# Altium PCB ArmourK08小智音响（1.54寸屏-充电可开关机版irony)PCB.pcbdoc
Units mil, origin at the board's own origin, x right, y up, seen from the top; angles counter-clockwise.
Board outline 1771.7 x 1418.1 mil, 2 copper layers (Top Layer, Bottom Layer), stack 62.2 mil thick; 89 components, 62 nets, 323 pads, 145 vias.
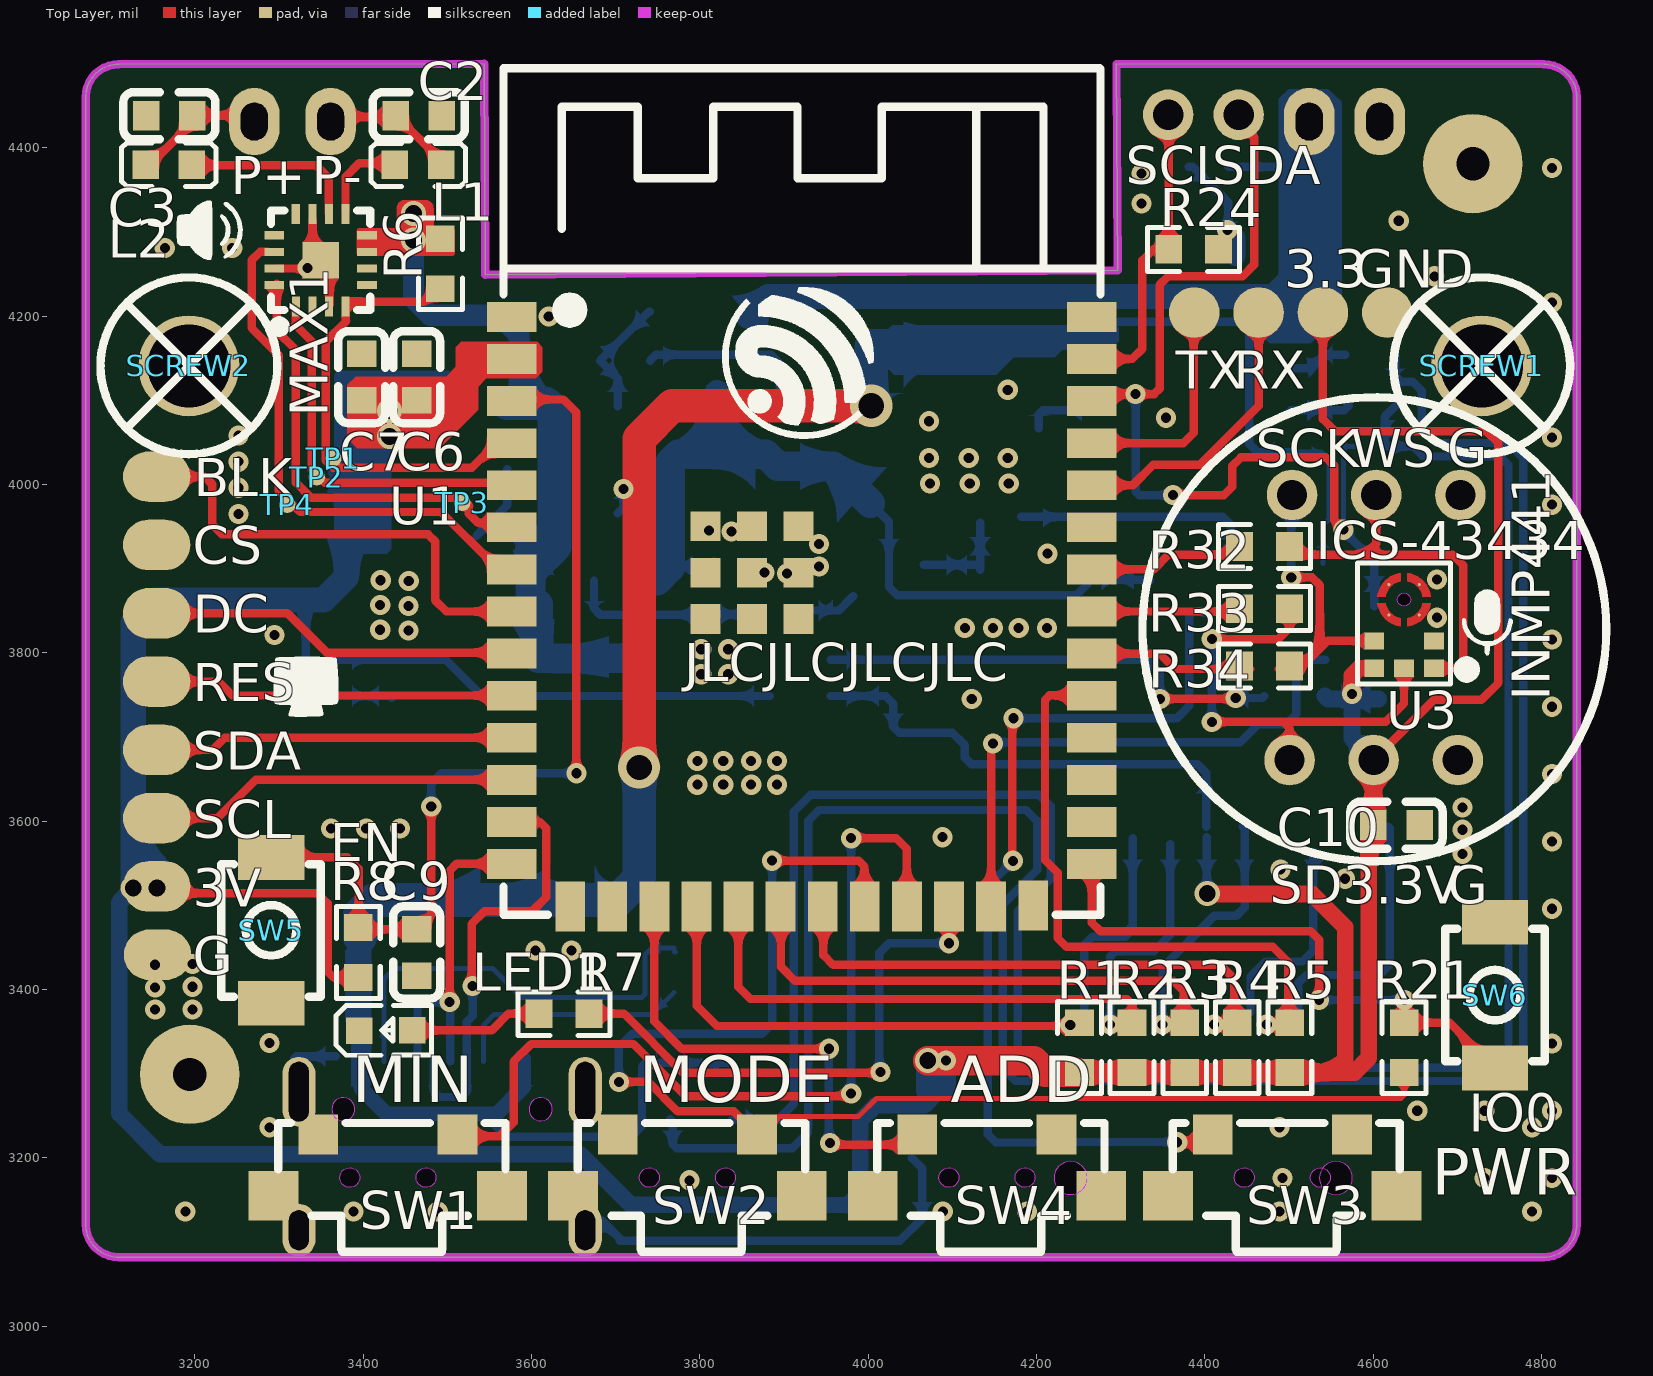
[diagram p0: Top Layer view]
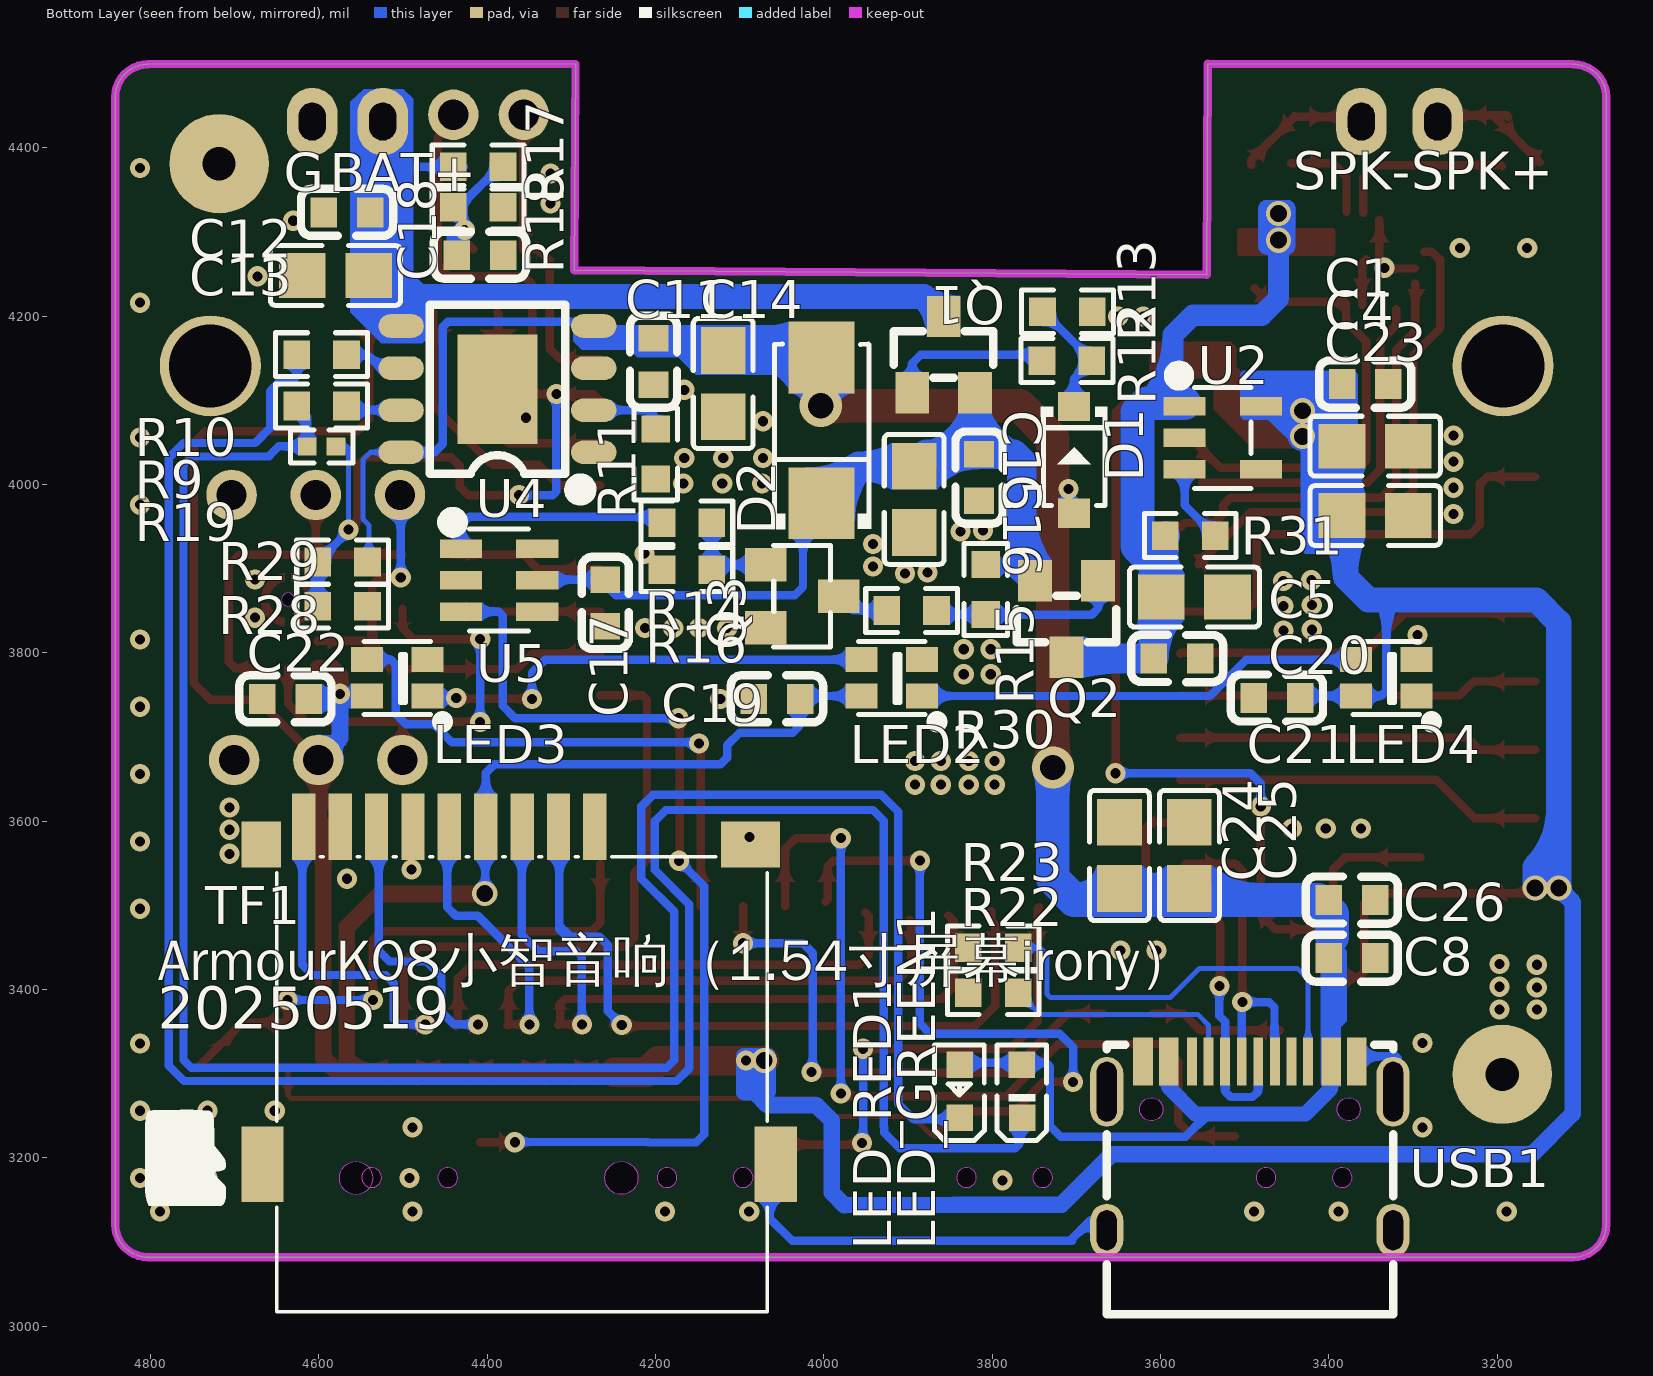
[diagram p1: Bottom Layer view, seen from below]

## Layer stack, top to bottom
Top Solder Mask Layer: solder mask 0.4, Dk 3.3
Top Layer: signal copper 1.4
SUBSTRATE1: surface 59.4, FR4, Dk 4.5
Bottom Layer: signal copper 1.4
Bottom Solder Mask Layer: solder mask 0.4, Dk 3.3

## Board outline
3070.3,3121.4 ccw(c3109.7,3121.4) 3109.7,3082 4802.6,3082 ccw(c4802.6,3121.4) 4841.9,3121.4 4841.9,4460 ccw(c4802.6,4460) 4802.6,4499.4 4295,4499.7 4296.3,4254.4 3544.9,4249.5 3544.1,4500.1 3109.7,4499.4 ccw(c3109.7,4460) 3070.3,4460

## Design rules (kind name [scope] priority, off if disabled: settings)
BoardOutlineClearance copperThickness1oz [All] p0: genericclearance=10 ignorepadtopadclearanceinfootprint=FALSE except(0: Arc-SplitContinuation Track-SplitContinuation SMDPad-SplitContinuation THPad-SplitContinuation Via-SplitContinuation Fill-SplitContinuation Poly-SplitContinuation Region-SplitContinuation Text-SplitContinuation)
BoardOutlineClearance copperThickness2oz [All] p0: genericclearance=10 ignorepadtopadclearanceinfootprint=FALSE except(0: Arc-SplitContinuation Track-SplitContinuation SMDPad-SplitContinuation THPad-SplitContinuation Via-SplitContinuation Fill-SplitContinuation Poly-SplitContinuation Region-SplitContinuation Text-SplitContinuation)
BoardOutlineClearance Plane_innerPlane [All] p0: genericclearance=10 ignorepadtopadclearanceinfootprint=FALSE except(0: Arc-SplitContinuation Track-SplitContinuation SMDPad-SplitContinuation THPad-SplitContinuation Via-SplitContinuation Fill-SplitContinuation Poly-SplitContinuation Region-SplitContinuation Text-SplitContinuation)
BoardOutlineClearance Copper_copperRegion [All] p0: genericclearance=10 ignorepadtopadclearanceinfootprint=FALSE except(0: Arc-SplitContinuation Track-SplitContinuation SMDPad-SplitContinuation THPad-SplitContinuation Via-SplitContinuation Fill-SplitContinuation Poly-SplitContinuation Region-SplitContinuation Text-SplitContinuation)
BoardOutlineClearance otherClearance [All] p0: genericclearance=10 ignorepadtopadclearanceinfootprint=FALSE except(0: Arc-SplitContinuation Track-SplitContinuation SMDPad-SplitContinuation THPad-SplitContinuation Via-SplitContinuation Fill-SplitContinuation Poly-SplitContinuation Region-SplitContinuation Text-SplitContinuation)
Clearance copperThickness1oz [All] p1: gap=7 ignorepadtopadclearanceinfootprint=FALSE
Clearance copperThickness2oz [All] p1: gap=7 ignorepadtopadclearanceinfootprint=FALSE
Clearance Plane_innerPlane [All] p1: gap=7 ignorepadtopadclearanceinfootprint=FALSE
Clearance Copper_copperRegion [All] p1: gap=7 ignorepadtopadclearanceinfootprint=FALSE
Clearance otherClearance [All] p1: gap=7 ignorepadtopadclearanceinfootprint=FALSE
DiffPairsRouting differentialPair [All] p1: maxuncoupledlength=10 minlimit=5.9843 maxlimit=Infinity mostfreqgap=5.9843 toplayer_minwidth=5 toplayer_prefwidth=10 toplayer_maxwidth=100 bottomlayer_minwidth=5 bottomlayer_prefwidth=10 bottomlayer_maxwidth=100
PasteMaskExpansion pasteMaskExpansion [All] p1: expansion=0
PlaneConnect innerPlane [All] p1: planeconnectstyle=Relief reliefexpansion=20 reliefentries=4 reliefconductorwidth=10 reliefairgap=10
PolygonConnect copperRegion [All] p1: connectstyle=Relief reliefentries=4 reliefconductorwidth=10 polygonreliefangle="90 Angle" airgapwidth=10
RoutingVias viaSize [All] p1: viastyle="Through Hole" holewidth=12.0078 minholewidth=11.811 maxholewidth=248.0314 width=12.0078 minwidth=11.811 maxwidth=248.0314
SolderMaskExpansion solderMaskExpansion [IsVia] p1: useseparateexpansions=TRUE expansion=-1000 expansionbottom=-1000
SolderMaskExpansion solderMaskExpansion [All] p2: useseparateexpansions=TRUE expansion=2.0079 expansionbottom=2.0079
Width copperThickness1oz [All] p1: maxlimit=100 minlimit=5 preferedwidth=10
Width copperThickness2oz [All] p1: maxlimit=100 minlimit=8 preferedwidth=10

## Components (designator, comment, footprint, x,y, rotation, side; value= is the part's Value field where it differs from the comment)
C1 "100nF" C0603#1 3356.7,4119.5 r0 bottom
C2 "220pF" C0603#2 3466,4438.3 r180 top
C3 "220pF" C0603#2 3169.7,4438.3 r0 top
C4 "22uF" C0805#1 3344.9,4045.7 r0 bottom
C5 "22uF" C0805#2 3559.7,3866.4 r0 bottom
C6 "100nF" C0603#1 3463.6,4127.6 r90 top
C7 "10uF" C0603#1 3398.3,4127.6 r90 top
C8 "10uF" C0603#2 3372.7,3437.4 r0 bottom
C9 "1uF" C0603#2 3463.6,3444.1 r90 top
C10 "100nF" C0603#1 4627.7,3595.4 r180 top
C11 "100nF" C0603#2 4202.4,4146 r270 bottom
C12 "100nF" C0603#2 4566.4,4323.4 r0 bottom
C13 "10uF" C0805#1 4580.2,4248.4 r0 bottom
C14 "10uF" C0805#1 4119.5,4120 r270 bottom
C15 "10uF" C0805#1 3892.7,3982.4 r90 bottom
C16 "100nF" C0603#3 3815.7,4008.4 r90 bottom
C17 "100nF" C0603#3 4259.7,3859.4 r270 bottom
C18 "100nF" C0603#2 4408.5,4272.4 r0 bottom
C19 "100nF" C0603#2 4055.7,3745.4 r0 bottom
C20 "100nF" C0603#1 3580.2,3793.4 r0 bottom
C21 "100nF" C0603#1 3461.7,3746.4 r180 bottom
C22 "100nF" C0603#1 4639.7,3745.4 r180 bottom
C23 "22uF" C0805#1 3344.9,3963.2 r180 bottom
C24 "22uF" C0805#1 3648.7,3559.4 r270 bottom
C25 "22uF" C0805#1 3565.7,3559.4 r270 bottom
C26 "100nF" C0603#2 3372.7,3506.4 r0 bottom
D1 "1N4148W" SOD-123_L2.7-W1.6-LS3.7-FD 3702.7,4029.4 r90 bottom
D2 "SS34" SMA_L4.3-W2.6-LS5.2-RD 4002.7,4064.4 r90 bottom
L1 "1uH" L0603 3465.4,4379.9 r180 top
L2 "1uH" L0603 3169,4380 r0 top
LED1 "NCD0603G1" LED0603-RD-YELLOW 3426.7,3351.4 r0 top
LED2 "WS2812C-2020-V1" LED-SMD_4P-L2.0-W2.0-TL_WS2812B-2020 3919.3,3770.4 r0 bottom
LED3 "WS2812C-2020-V1" LED-SMD_4P-L2.0-W2.0-TL_WS2812B-2020 4506.8,3770.4 r0 bottom
LED4 "WS2812C-2020-V1" LED-SMD_4P-L2.0-W2.0-TL_WS2812B-2020 3331.8,3770.4 r0 bottom
LED_GREEN1 "XL-1608PGC-06" LED0603-RD_GREEN 3764.7,3279.4 r90 bottom
LED_RED1 "KT-0603R" LED0603-RD 3838.7,3279.4 r90 bottom
MAX1 "MAX98357AETE+T" TQFN-16_L3.0-W3.0-P0.50-BL-EP1.1 3349.5,4266.5 r0 top
Q1 "AO3401A" SOT-23_L2.9-W1.3-P1.90-LS2.4-BR 3857.7,4154.4 r270 bottom
Q2 "AO3401A" SOT-23_L2.9-W1.3-P1.90-LS2.4-BR 3711.7,3840.4 r90 bottom
Q3 "S8050 J3Y(RANGE:200-350)" SOT-23-3_L3.0-W1.7-P0.95-LS2.9-BR 4025.7,3867.4 r0 bottom
R1 "10kΩ" R0603#1 4251,3331 r90 top
R2 "10kΩ" R0603#1 4313.5,3331 r90 top
R3 "10kΩ" R0603#1 4376,3331 r90 top
R4 "10kΩ" R0603#1 4438.5,3331 r90 top
R5 "10kΩ" R0603#1 4501,3331 r90 top
R6 "1MΩ" R0603#2 3491.8,4262.3 r270 top
R7 "1kΩ" R0603#1 3638.7,3371.4 r180 top
R8 "10kΩ" R0603#2 3394.3,3444.1 r270 top
R9 "4.7kΩ" R0603#1 4596.7,4093.4 r180 bottom
R10 "10kΩ" R0603#1 4596.7,4154.4 r180 bottom
R11 "4.7kΩ" R0603#2 4199.7,4036.4 r270 bottom
R12 "100kΩ" R0603#3 3711.2,4147.3 r180 bottom
R13 "100kΩ" R0603#1 3710.7,4205.4 r180 bottom
R14 "10kΩ" R0603#3 4162.7,3954.6 r180 bottom
R15 "100kΩ" R0603#2 3807.7,3875.4 r90 bottom
R16 "100kΩ" R0603#1 4162.7,3899 r0 bottom
R17 "10kΩ" R0603#3 4410.7,4377.4 r0 bottom
R18 "10kΩ" R0603#3 4410.7,4329.4 r0 bottom
R19 "4.7kΩ" R0402 4596.7,4045.4 r0 bottom
R21 "0Ω" R0603#3 4636.7,3331 r270 top
R22 "5.1kΩ" R0603#1 3798.8,3396.4 r180 bottom
R23 "5.1kΩ" R0603#1 3798.8,3449.6 r180 bottom
R24 "0Ω" R0603#3 4386.7,4279.4 r0 top
R28 "10kΩ" R0603#3 4571.7,3855.4 r0 bottom
R29 "10kΩ" R0603#1 4571.7,3908 r180 bottom
R30 "0Ω" R0603#1 3895.7,3850.4 r180 bottom
R31 "100kΩ" R0603#3 3564.7,3939.4 r0 bottom
R32 "0Ω" R0603#3 4471,3926.4 r0 top
R33 "0Ω" R0603#1 4471,3852.7 r180 top
R34 "0Ω" R0603#1 4471,3784.4 r180 top
SCREW1 "" M3螺丝 4728.9,4141 r0 top
SCREW2 "" M3螺丝 3193,4141 r0 top
SW1 "TS-1087B-B2D2" KEY-SMD_4P-L7.8-W2.8-P4.20-EH 3429.3,3191.4 r180 top
SW2 "TS-1087B-B2D2" KEY-SMD_4P-L7.8-W2.8-P4.20-EH 3785.2,3191.4 r180 top
SW3 "TS-1087B-B2D2" KEY-SMD_4P-L7.8-W2.8-P4.20-EH 4492,3191.4 r180 top
SW4 "TS-1087B-B2D2" KEY-SMD_4P-L7.8-W2.8-P4.20-EH 4141.1,3191.4 r180 top
SW5 "TC-S3403-2.0-260G" SW-SMD_L4.0-W3.0-LS5.0 3290.7,3470.4 r90 top
SW6 "TC-S3403-2.0-260G" SW-SMD_L4.0-W3.0-LS5.0 4744.7,3393.4 r90 top
TF1 "TF-015" TF-SMD_TF-015 4362.8,3393 r180 bottom
TP1 "" Test-Point-0.5mm 3364.7,4031.2 r0 top
TP2 "" Test-Point-0.5mm 3344.7,4008.8 r0 top
TP3 "" Test-Point-0.5mm 3517.7,3978.5 r0 top
TP4 "" Test-Point-0.5mm 3309.7,3976.1 r0 top
U1 "ESP32-S3-WROOM-1-N16R8" WIRELM-SMD_ESP32-S3-WROOM-1 3921,3849 r0 top locked
U2 "ME6211C33M5G-N" SOT-23-5_L3.0-W1.7-P0.95-LS2.8-BL 3526,4055.5 r270 bottom
U3 "ICS-43434" MIC-SMD_6P-L3.5-W2.7-P0.90-BL 4636.7,3832.4 r90 top
U4 "TP4056" ESOP-8_L4.9-W3.9-P1.27-LS6.0-BL-EP 4387.7,4113.4 r90 bottom
U5 "EC190708" SOT-23-6_L2.9-W1.6-P0.95-LS2.8-BL 4385.8,3886.4 r270 bottom
USB1 "Type-C" USB-C-SMD_TYPEC-304-BCP16 3493.7,3214.4 r180 bottom

## Footprints (in the part's own frame and the unit in brackets; to place one, negate y for a bottom-side part, rotate by r counter-clockwise, add the part's x,y. Pads: shape width x height; smd on the part's side, far side on the other; paste and mask are expansions set on the pad)
C0603#1 [mil]
  rect 31.5x35.4 smd: 1(-27.5,0) 2(27.6,0)
  silkscreen extent -55,-28 55,28
C0603#2 [mil]
  rect 31.5x35.4 smd: 1(-27.6,0) 2(27.5,0)
  silkscreen extent -55,-28 55,28
C0603#3 [mil]
  rect 31.5x35.4 smd: 1(-27.6,0) 2(27.6,0)
  silkscreen extent -55,-28 55,28
C0805#1 [mil]
  rect 55.5x53.1 smd paste-3937 mask+2: 1(-39.4,0) 2(39.4,0)
  silkscreen extent -77,-36 77,36
C0805#2 [mil]
  rect 55.5x53.1 smd paste-3937 mask+2: 1(-39.4,0) 2(39.3,0)
  silkscreen extent -77,-36 77,36
ESOP-8_L4.9-W3.9-P1.27-LS6.0-BL-EP [mil]
  oval 28x54 smd: 1(-75,-114.5) 2(-25,-114.5) 3(25,-114.5) 4(75,-114.5) 5(75,114.5) 6(25,114.5) 7(-25,114.5) 8(-75,114.5)
  rect 129.9x94.5 smd: 9(0,0)
  silkscreen extent -126,-105 100,81
KEY-SMD_4P-L7.8-W2.8-P4.20-EH [mil]
  rect 47.2x47.2 smd: 1(-82.7,-36.4) 2(82.7,-36.4)
  rect 59.1x59.1 smd: 3(-135.8,36.4) 4(135.8,36.4)
  Board Outline Layer lines w0.1: 57.1,14.7 56.7,11.8 55.6,9 53.9,6.6 51.6,4.8 48.9,3.5 46,2.9 43,3.1 40.2,4 37.7,5.6 35.7,7.8 34.3,10.4 33.5,13.2 33.5,16.2 34.3,19.1 35.7,21.7 37.7,23.8 40.2,25.4 43,26.3 46,26.5 48.9,26 51.6,24.7 53.9,22.8 55.6,20.4 56.7,17.7 57.1,14.7 ; -33.5,14.7 -33.9,11.8 -35,9 -36.7,6.6 -39,4.8 -41.7,3.5 -44.6,2.9 -47.5,3.1 -50.3,4 -52.8,5.6 -54.9,7.8 -56.3,10.4 -57,13.2 -57,16.2 -56.3,19.1 -54.9,21.7 -52.8,23.8 -50.3,25.4 -47.5,26.3 -44.6,26.5 -41.7,26 -39,24.7 -36.7,22.8 -35,20.4 -33.9,17.7 -33.5,14.7
  Board Outline Layer region: -33.5,14.7 -33.9,11.8 -35,9 -36.7,6.6 -39,4.8 -41.7,3.5 -44.6,2.9 -47.5,3.1 -50.3,4 -52.8,5.6 -54.9,7.8 -56.3,10.4 -57,13.2 -57,16.2 -56.3,19.1 -54.9,21.7 -52.8,23.8 -50.3,25.4 -47.5,26.3 -44.6,26.5 -41.7,26 -39,24.7 -36.7,22.8 -35,20.4 -33.9,17.7
  Board Outline Layer region: -33.5,14.7 -33.9,11.8 -35,9 -36.7,6.6 -39,4.8 -41.7,3.5 -44.6,2.9 -47.5,3.1 -50.3,4 -52.8,5.6 -54.9,7.8 -56.3,10.4 -57,13.2 -57,16.2 -56.3,19.1 -54.9,21.7 -52.8,23.8 -50.3,25.4 -47.5,26.3 -44.6,26.5 -41.7,26 -39,24.7 -36.7,22.8 -35,20.4 -33.9,17.7
  Board Outline Layer region: 57.1,14.7 56.7,11.8 55.6,9 53.9,6.6 51.6,4.8 48.9,3.5 46,2.9 43,3.1 40.2,4 37.7,5.6 35.7,7.8 34.3,10.4 33.5,13.2 33.5,16.2 34.3,19.1 35.7,21.7 37.7,23.8 40.2,25.4 43,26.3 46,26.5 48.9,26 51.6,24.7 53.9,22.8 55.6,20.4 56.7,17.7
  Board Outline Layer region: 57.1,14.7 56.7,11.8 55.6,9 53.9,6.6 51.6,4.8 48.9,3.5 46,2.9 43,3.1 40.2,4 37.7,5.6 35.7,7.8 34.3,10.4 33.5,13.2 33.5,16.2 34.3,19.1 35.7,21.7 37.7,23.8 40.2,25.4 43,26.3 46,26.5 48.9,26 51.6,24.7 53.9,22.8 55.6,20.4 56.7,17.7
  Multi-Layer board cut-out: -33.5,14.7 -33.9,11.8 -35,9 -36.7,6.6 -39,4.8 -41.7,3.5 -44.6,2.9 -47.5,3.1 -50.3,4 -52.8,5.6 -54.9,7.8 -56.3,10.4 -57,13.2 -57,16.2 -56.3,19.1 -54.9,21.7 -52.8,23.8 -50.3,25.4 -47.5,26.3 -44.6,26.5 -41.7,26 -39,24.7 -36.7,22.8 -35,20.4 -33.9,17.7
  Multi-Layer board cut-out: 57.1,14.7 56.7,11.8 55.6,9 53.9,6.6 51.6,4.8 48.9,3.5 46,2.9 43,3.1 40.2,4 37.7,5.6 35.7,7.8 34.3,10.4 33.5,13.2 33.5,16.2 34.3,19.1 35.7,21.7 37.7,23.8 40.2,25.4 43,26.3 46,26.5 48.9,26 51.6,24.7 53.9,22.8 55.6,20.4 56.7,17.7
  silkscreen extent -140,-50 130,103
L0603 [mil]
  rect 31.5x34 smd paste-3937 mask+2: 1(-27.5,0) 2(27.6,0)
  silkscreen extent -56,-26 56,26
LED0603-RD [mil]
  rect 31.5x31.5 smd: 1(-31.5,0) 2(31.5,0)
  silkscreen extent -59,-29 55,30
LED0603-RD-YELLOW [mil]
  rect 31.5x31.5 smd: 1(-31.5,-0.1) 2(31.4,0.1)
  silkscreen extent -59,-29 55,30
LED0603-RD_GREEN [mil]
  rect 31.5x31.5 smd: 1(-31.5,-0.2) 2(31.5,0.1)
  silkscreen extent -59,-29 55,30
LED-SMD_4P-L2.0-W2.0-TL_WS2812B-2020 [mil]
  rect 38x30 smd: 1(-36.1,21.6) 2(-36.1,-21.7) 3(36,-21.7) 4(36,21.6)
  silkscreen extent -54,-43 39,53
M3螺丝 [mil]
  round 120 hole 98.4 paste+0 mask+4: 1(0,0)
  silkscreen extent -105,-105 105,105
MIC-SMD_6P-L3.5-W2.7-P0.90-BL [mil]
  rect 20.5x23.6 smd paste+0 mask+2: 1(-50.6,-35.4) 2(-18.3,-35.4) 4(-18.3,35.5) 5(-50.6,35.5) 6(-50.6,0)
  round 3.4 smd: 3(12.7,18.1) 3(12.7,-18.1) 3(48.8,-18.1) 3(48.8,18.1)
  Top Layer region: -1,3.9 -1,3.9 -0.8,5.5 -0.4,7.1 0,8.7 0.4,10.3 1,11.8 1.6,13.3 2.4,14.8 3.2,16.2 4,17.6 4.9,18.9 5.9,20.2 7,21.5 8.1,22.7 9.3,23.8 10.6,24.9 11.8,25.9 13.2,26.8 14.6,27.6 16,28.4 17.5,29.2 19,29.8 20.5,30.4 22.1,30.8 23.7,31.2 25.3,31.6 26.9,31.8 26.9,31.8 26.9,21.9 25.6,21.6 24.3,21.2 23,20.8 21.7,20.3 20.5,19.7 19.3,19 18.2,18.3 17.1,17.5 16.1,16.6 15.1,15.7 14.2,14.7 13.3,13.7 12.5,12.6 11.8,11.5 11.1,10.3 10.5,9.1 10,7.8 9.6,6.5 9.2,5.2 8.9,3.9 8.9,3.9
  Top Layer region: 26.9,-31.7 26.9,-31.7 25.3,-31.5 23.7,-31.2 22.1,-30.8 20.5,-30.3 19,-29.7 17.5,-29.1 16,-28.4 14.6,-27.6 13.2,-26.7 11.8,-25.8 10.6,-24.8 9.3,-23.7 8.1,-22.6 7,-21.4 5.9,-20.2 4.9,-18.9 4,-17.5 3.2,-16.1 2.4,-14.7 1.6,-13.2 1,-11.7 0.4,-10.2 0,-8.7 -0.4,-7.1 -0.8,-5.5 -1,-3.9 -1,-3.8 8.9,-3.8 9.2,-5.1 9.6,-6.4 10,-7.7 10.5,-9 11.1,-10.2 11.8,-11.4 12.5,-12.5 13.3,-13.6 14.2,-14.7 15.1,-15.6 16.1,-16.6 17.1,-17.4 18.2,-18.2 19.3,-19 20.5,-19.6 21.7,-20.2 23,-20.7 24.3,-21.2 25.6,-21.5 26.9,-21.8 26.9,-21.8
  Top Layer region: 62.5,-3.8 62.5,-3.9 62.3,-5.5 62,-7.1 61.6,-8.7 61.1,-10.2 60.5,-11.7 59.9,-13.3 59.2,-14.7 58.4,-16.2 57.5,-17.5 56.6,-18.9 55.6,-20.2 54.5,-21.4 53.4,-22.6 52.2,-23.7 51,-24.8 49.7,-25.8 48.3,-26.7 46.9,-27.6 45.5,-28.4 44,-29.1 42.5,-29.7 41,-30.3 39.4,-30.8 37.9,-31.2 36.3,-31.5 34.6,-31.7 34.6,-31.7 34.6,-21.8 35.9,-21.5 37.2,-21.2 38.5,-20.7 39.8,-20.2 41,-19.6 42.2,-19 43.3,-18.2 44.4,-17.4 45.4,-16.6 46.4,-15.6 47.4,-14.7 48.2,-13.6 49,-12.5 49.8,-11.4 50.4,-10.2 51,-9 51.5,-7.7 52,-6.4 52.3,-5.1 52.6,-3.8 52.6,-3.8
  Top Layer region: 34.6,31.8 34.7,31.8 36.3,31.6 37.9,31.2 39.5,30.8 41,30.4 42.5,29.8 44,29.1 45.5,28.4 46.9,27.6 48.3,26.8 49.7,25.8 51,24.8 52.2,23.8 53.4,22.7 54.5,21.5 55.6,20.2 56.6,18.9 57.5,17.6 58.4,16.2 59.2,14.8 59.9,13.3 60.5,11.8 61.1,10.3 61.6,8.7 62,7.1 62.3,5.5 62.5,3.9 62.5,3.9 52.6,3.9 52.3,5.2 52,6.5 51.5,7.8 51,9 50.4,10.3 49.8,11.4 49,12.6 48.2,13.7 47.4,14.7 46.4,15.7 45.4,16.6 44.4,17.5 43.3,18.3 42.2,19 41,19.7 39.8,20.3 38.5,20.8 37.2,21.2 35.9,21.6 34.6,21.9 34.6,21.9
  Board Outline Layer lines w0.1: 31,7.9 28.5,7.5 26.3,6.4 24.6,4.7 23.5,2.5 23.1,0 23.5,-2.4 24.6,-4.6 26.3,-6.3 28.5,-7.5 31,-7.8 33.4,-7.5 35.6,-6.3 37.3,-4.6 38.4,-2.4 38.8,0 38.4,2.5 37.3,4.7 35.6,6.4 33.4,7.5 31,7.9
  Board Outline Layer region: 38.8,0 38.4,-2.4 37.3,-4.6 35.6,-6.3 33.4,-7.5 31,-7.8 28.5,-7.5 26.3,-6.3 24.6,-4.6 23.5,-2.4 23.1,0 23.5,2.5 24.6,4.7 26.3,6.4 28.5,7.5 31,7.9 33.4,7.5 35.6,6.4 37.3,4.7 38.4,2.5
  Board Outline Layer region: 38.8,0 38.4,-2.4 37.3,-4.6 35.6,-6.3 33.4,-7.5 31,-7.8 28.5,-7.5 26.3,-6.3 24.6,-4.6 23.5,-2.4 23.1,0 23.5,2.5 24.6,4.7 26.3,6.4 28.5,7.5 31,7.9 33.4,7.5 35.6,6.4 37.3,4.7 38.4,2.5
  Multi-Layer board cut-out: 38.8,0 38.4,-2.4 37.3,-4.6 35.6,-6.3 33.4,-7.5 31,-7.8 28.5,-7.5 26.3,-6.3 24.6,-4.6 23.5,-2.4 23.1,0 23.5,2.5 24.6,4.7 26.3,6.4 28.5,7.5 31,7.9 33.4,7.5 35.6,6.4 37.3,4.7 38.4,2.5
  silkscreen extent -70,-80 74,55
R0402 [mil]
  rect 22.3x21.3 smd paste-3937 mask+2: 1(-17.1,0) 2(17,0)
  silkscreen extent -37,-20 37,20
R0603#1 [mil]
  rect 31.8x34 smd paste-3937 mask+2: 1(-29.6,0) 2(29.7,0)
  silkscreen extent -54,-26 55,26
R0603#2 [mil]
  rect 31.8x34 smd paste-3937 mask+2: 1(-29.7,0) 2(29.7,0)
  silkscreen extent -55,-26 55,26
R0603#3 [mil]
  rect 31.8x34 smd paste-3937 mask+2: 1(-29.7,0) 2(29.6,0)
  silkscreen extent -55,-26 54,26
SMA_L4.3-W2.6-LS5.2-RD [mil]
  rect 85x78.7 smd: 1(-86.6,0) 2(86.6,0)
  silkscreen extent -117,-59 102,59
SOD-123_L2.7-W1.6-LS3.7-FD [mil]
  rect 34.6x37.8 smd: 1(-63.4,0) 2(63.4,0)
  silkscreen extent -54,-40 63,39
SOT-23-3_L3.0-W1.7-P0.95-LS2.9-BR [mil]
  rect 49.2x40 smd: 1(43.3,-37.4) 2(43.3,37.4) 3(-43.4,0)
  silkscreen extent -34,-60 34,60
SOT-23-5_L3.0-W1.7-P0.95-LS2.8-BL [mil]
  rect 22x50 smd: 1(-37.4,-45.4) 2(0,-45.4) 3(37.4,-45.4) 4(37.4,45.4) 5(-37.4,45.4)
  silkscreen extent -82,-60 60,34
SOT-23-6_L2.9-W1.6-P0.95-LS2.8-BL [mil]
  rect 22x50 smd: 1(-37.4,-45.2) 2(0,-45.2) 3(37.4,-45.2) 4(37.4,45.3) 5(0,45.3) 6(-37.4,45.3)
  silkscreen extent -75,-61 61,35
SOT-23_L2.9-W1.3-P1.90-LS2.4-BR [mil]
  rect 49.2x40 smd: 1(45.3,-37.4) 2(45.3,37.4) 3(-45.3,0)
  silkscreen extent -28,-59 28,59
SW-SMD_L4.0-W3.0-LS5.0 [mil]
  rect 53.1x78.7 smd: 1(-86.6,0) 2(86.6,0)
  silkscreen extent -79,-59 79,59
Test-Point-0.5mm [mil]
  round 19.7 smd: 1(0,0)
TF-SMD_TF-015 [mil]
  rect 27.6x78.7 smd: 1(90.7,200.6) 2(47.6,200.6) 3(4.5,200.6) 4(-38.8,200.6) 5(-82.1,200.6) 6(-125.3,200.6) 7(-168.5,200.6) 8(-211.7,200.6) 9(-255.2,200.6)
  rect 47.2x55 smd: 10(-305.7,179.4)
  rect 50x90 smd: 11(-304.3,-200.6) 12(305.7,-200.6)
  rect 70x55 smd: 13(275.7,179.4)
  Board Outline Layer lines w0.1: 141.8,-216.7 141.5,-220.5 140.3,-224.2 138.5,-227.6 136.1,-230.6 133.1,-233 129.7,-234.9 126,-236 122.2,-236.4 118.3,-236 114.6,-234.9 111.2,-233 108.2,-230.6 105.8,-227.6 104,-224.2 102.9,-220.5 102.5,-216.7 102.9,-212.8 104,-209.1 105.8,-205.7 108.2,-202.7 111.2,-200.3 114.6,-198.5 118.3,-197.4 122.2,-197 126,-197.4 129.7,-198.5 133.1,-200.3 136.1,-202.7 138.5,-205.7 140.3,-209.1 141.5,-212.8 141.8,-216.7 ; -173.1,-216.8 -173.5,-220.6 -174.6,-224.3 -176.4,-227.7 -178.9,-230.7 -181.9,-233.1 -185.3,-235 -189,-236.1 -192.8,-236.5 -196.6,-236.1 -200.3,-235 -203.7,-233.1 -206.7,-230.7 -209.2,-227.7 -211,-224.3 -212.1,-220.6 -212.5,-216.8 -212.1,-212.9 -211,-209.2 -209.2,-205.8 -206.7,-202.8 -203.7,-200.4 -200.3,-198.6 -196.6,-197.5 -192.8,-197.1 -189,-197.5 -185.3,-198.6 -181.9,-200.4 -178.9,-202.8 -176.4,-205.8 -174.6,-209.2 -173.5,-212.9 -173.1,-216.8
  Board Outline Layer region: -173.1,-216.8 -173.5,-220.6 -174.6,-224.3 -176.4,-227.7 -178.9,-230.7 -181.9,-233.1 -185.3,-235 -189,-236.1 -192.8,-236.5 -196.6,-236.1 -200.3,-235 -203.7,-233.1 -206.7,-230.7 -209.2,-227.7 -211,-224.3 -212.1,-220.6 -212.5,-216.8 -212.1,-212.9 -211,-209.2 -209.2,-205.8 -206.7,-202.8 -203.7,-200.4 -200.3,-198.6 -196.6,-197.5 -192.8,-197.1 -189,-197.5 -185.3,-198.6 -181.9,-200.4 -178.9,-202.8 -176.4,-205.8 -174.6,-209.2 -173.5,-212.9
  Board Outline Layer region: -173.1,-216.8 -173.5,-220.6 -174.6,-224.3 -176.4,-227.7 -178.9,-230.7 -181.9,-233.1 -185.3,-235 -189,-236.1 -192.8,-236.5 -196.6,-236.1 -200.3,-235 -203.7,-233.1 -206.7,-230.7 -209.2,-227.7 -211,-224.3 -212.1,-220.6 -212.5,-216.8 -212.1,-212.9 -211,-209.2 -209.2,-205.8 -206.7,-202.8 -203.7,-200.4 -200.3,-198.6 -196.6,-197.5 -192.8,-197.1 -189,-197.5 -185.3,-198.6 -181.9,-200.4 -178.9,-202.8 -176.4,-205.8 -174.6,-209.2 -173.5,-212.9
  Board Outline Layer region: 141.8,-216.7 141.5,-220.5 140.3,-224.2 138.5,-227.6 136.1,-230.6 133.1,-233 129.7,-234.9 126,-236 122.2,-236.4 118.3,-236 114.6,-234.9 111.2,-233 108.2,-230.6 105.8,-227.6 104,-224.2 102.9,-220.5 102.5,-216.7 102.9,-212.8 104,-209.1 105.8,-205.7 108.2,-202.7 111.2,-200.3 114.6,-198.5 118.3,-197.4 122.2,-197 126,-197.4 129.7,-198.5 133.1,-200.3 136.1,-202.7 138.5,-205.7 140.3,-209.1 141.5,-212.8
  Board Outline Layer region: 141.8,-216.7 141.5,-220.5 140.3,-224.2 138.5,-227.6 136.1,-230.6 133.1,-233 129.7,-234.9 126,-236 122.2,-236.4 118.3,-236 114.6,-234.9 111.2,-233 108.2,-230.6 105.8,-227.6 104,-224.2 102.9,-220.5 102.5,-216.7 102.9,-212.8 104,-209.1 105.8,-205.7 108.2,-202.7 111.2,-200.3 114.6,-198.5 118.3,-197.4 122.2,-197 126,-197.4 129.7,-198.5 133.1,-200.3 136.1,-202.7 138.5,-205.7 140.3,-209.1 141.5,-212.8
  Multi-Layer board cut-out: -173.1,-216.8 -173.5,-220.6 -174.6,-224.3 -176.4,-227.7 -178.9,-230.7 -181.9,-233.1 -185.3,-235 -189,-236.1 -192.8,-236.5 -196.6,-236.1 -200.3,-235 -203.7,-233.1 -206.7,-230.7 -209.2,-227.7 -211,-224.3 -212.1,-220.6 -212.5,-216.8 -212.1,-212.9 -211,-209.2 -209.2,-205.8 -206.7,-202.8 -203.7,-200.4 -200.3,-198.6 -196.6,-197.5 -192.8,-197.1 -189,-197.5 -185.3,-198.6 -181.9,-200.4 -178.9,-202.8 -176.4,-205.8 -174.6,-209.2 -173.5,-212.9
  Multi-Layer board cut-out: 141.8,-216.7 141.5,-220.5 140.3,-224.2 138.5,-227.6 136.1,-230.6 133.1,-233 129.7,-234.9 126,-236 122.2,-236.4 118.3,-236 114.6,-234.9 111.2,-233 108.2,-230.6 105.8,-227.6 104,-224.2 102.9,-220.5 102.5,-216.7 102.9,-212.8 104,-209.1 105.8,-205.7 108.2,-202.7 111.2,-200.3 114.6,-198.5 118.3,-197.4 122.2,-197 126,-197.4 129.7,-198.5 133.1,-200.3 136.1,-202.7 138.5,-205.7 140.3,-209.1 141.5,-212.8
  silkscreen extent -287,-376 295,165
TQFN-16_L3.0-W3.0-P0.50-BL-EP1.1 [mil]
  rect 9.8x23.6 smd paste-3937 mask+2: 1(-29.4,-55.1) 2(-9.7,-55.1) 3(10,-55.1) 4(29.6,-55.1) 9(29.6,55.1) 10(9.9,55.1) 11(-9.8,55.1) 12(-29.5,55.1)
  rect 23.6x9.8 smd paste-3937 mask+2: 5(55.2,-29.4) 6(55.2,-9.8) 7(55.2,9.9) 8(55.2,29.6) 13(-55.1,29.6) 14(-55.1,9.9) 15(-55.1,-9.8) 16(-55.1,-29.4)
  rect 43.3x43.3 smd paste-3937 mask+2: 17(0,0)
  silkscreen extent -59,-84 59,59
USB-C-SMD_TYPEC-304-BCP16 [mil]
  oval 39.4x82.7 hole 23.6 slot 70.9 at 90 deg paste+0 mask+2: 13(-170.1,64.3) 14(170.1,64.3)
  oval 39.4x63 hole 23.6 slot 47.2 at 90 deg paste+0 mask+2: 15(-170.1,-100.3) 16(170.1,-100.3)
  rect 23.6x57.1 smd paste+0 mask+2: A1B12(-127,100.3) A4B9(-96.5,100.3) B1A12(126.8,100.3) B4A9(96.5,100.3)
  rect 11.8x57.1 smd paste+0 mask+2: A5(-49.2,100.3) A6(-9.8,100.3) A7(9.8,100.3) A8(49.2,100.3) B5(68.9,100.3) B6(29.5,100.3) B7(-29.5,100.3) B8(-68.9,100.3)
  Board Outline Layer lines w0.1: 131.1,43.4 130.7,40.2 129.6,37.2 127.9,34.5 125.5,32.3 122.8,30.7 119.7,29.8 116.5,29.6 113.3,30.2 110.4,31.5 107.8,33.4 105.8,35.8 104.3,38.7 103.6,41.8 103.6,45 104.3,48.1 105.8,51 107.8,53.4 110.4,55.4 113.3,56.6 116.5,57.2 119.7,57 122.8,56.1 125.5,54.5 127.9,52.3 129.6,49.6 130.7,46.6 131.1,43.4 ; -103.5,43.4 -103.9,40.2 -105,37.2 -106.7,34.5 -109.1,32.3 -111.8,30.7 -114.9,29.8 -118.1,29.6 -121.3,30.2 -124.2,31.5 -126.8,33.4 -128.8,35.8 -130.3,38.7 -131,41.8 -131,45 -130.3,48.1 -128.8,51 -126.8,53.4 -124.2,55.4 -121.3,56.6 -118.1,57.2 -114.9,57 -111.8,56.1 -109.1,54.5 -106.7,52.3 -105,49.6 -103.9,46.6 -103.5,43.4
  Board Outline Layer region: 131.1,43.4 130.7,40.2 129.6,37.2 127.9,34.5 125.5,32.3 122.8,30.7 119.7,29.8 116.5,29.6 113.3,30.2 110.4,31.5 107.8,33.4 105.8,35.8 104.3,38.7 103.6,41.8 103.6,45 104.3,48.1 105.8,51 107.8,53.4 110.4,55.4 113.3,56.6 116.5,57.2 119.7,57 122.8,56.1 125.5,54.5 127.9,52.3 129.6,49.6 130.7,46.6
  Board Outline Layer region: 131.1,43.4 130.7,40.2 129.6,37.2 127.9,34.5 125.5,32.3 122.8,30.7 119.7,29.8 116.5,29.6 113.3,30.2 110.4,31.5 107.8,33.4 105.8,35.8 104.3,38.7 103.6,41.8 103.6,45 104.3,48.1 105.8,51 107.8,53.4 110.4,55.4 113.3,56.6 116.5,57.2 119.7,57 122.8,56.1 125.5,54.5 127.9,52.3 129.6,49.6 130.7,46.6
  Board Outline Layer region: -103.5,43.4 -103.9,40.2 -105,37.2 -106.7,34.5 -109.1,32.3 -111.8,30.7 -114.9,29.8 -118.1,29.6 -121.3,30.2 -124.2,31.5 -126.8,33.4 -128.8,35.8 -130.3,38.7 -131,41.8 -131,45 -130.3,48.1 -128.8,51 -126.8,53.4 -124.2,55.4 -121.3,56.6 -118.1,57.2 -114.9,57 -111.8,56.1 -109.1,54.5 -106.7,52.3 -105,49.6 -103.9,46.6
  Board Outline Layer region: -103.5,43.4 -103.9,40.2 -105,37.2 -106.7,34.5 -109.1,32.3 -111.8,30.7 -114.9,29.8 -118.1,29.6 -121.3,30.2 -124.2,31.5 -126.8,33.4 -128.8,35.8 -130.3,38.7 -131,41.8 -131,45 -130.3,48.1 -128.8,51 -126.8,53.4 -124.2,55.4 -121.3,56.6 -118.1,57.2 -114.9,57 -111.8,56.1 -109.1,54.5 -106.7,52.3 -105,49.6 -103.9,46.6
  Multi-Layer board cut-out: 131.1,43.4 130.7,40.2 129.6,37.2 127.9,34.5 125.5,32.3 122.8,30.7 119.7,29.8 116.5,29.6 113.3,30.2 110.4,31.5 107.8,33.4 105.8,35.8 104.3,38.7 103.6,41.8 103.6,45 104.3,48.1 105.8,51 107.8,53.4 110.4,55.4 113.3,56.6 116.5,57.2 119.7,57 122.8,56.1 125.5,54.5 127.9,52.3 129.6,49.6 130.7,46.6
  Multi-Layer board cut-out: -103.5,43.4 -103.9,40.2 -105,37.2 -106.7,34.5 -109.1,32.3 -111.8,30.7 -114.9,29.8 -118.1,29.6 -121.3,30.2 -124.2,31.5 -126.8,33.4 -128.8,35.8 -130.3,38.7 -131,41.8 -131,45 -130.3,48.1 -128.8,51 -126.8,53.4 -124.2,55.4 -121.3,56.6 -118.1,57.2 -114.9,57 -111.8,56.1 -109.1,54.5 -106.7,52.3 -105,49.6 -103.9,46.6
  silkscreen extent -170,-200 170,120
WIRELM-SMD_ESP32-S3-WROOM-1 [mil]
  rect 59.1x35.4 smd paste+0 mask+2: 1(-344.5,350.2) 2(-344.5,300.2) 3(-344.5,250.2) 4(-344.5,200.2) 5(-344.5,150.2) 6(-344.5,100.2) 7(-344.5,50.2) 8(-344.5,0.2) 9(-344.5,-49.8) 10(-344.5,-99.8) 11(-344.5,-149.8) 12(-344.5,-199.8) 13(-344.5,-249.8) 14(-344.5,-299.8) 27(344.5,-299.8) 28(344.5,-249.8) 29(344.5,-199.8) 30(344.5,-149.8) 31(344.5,-99.8) 32(344.5,-49.8) 33(344.5,0.2) 34(344.5,50.2) 35(344.5,100.2) 36(344.5,150.2) 37(344.5,200.2) 38(344.5,250.2) 39(344.5,300.2) 40(344.5,350.2)
  rect 35.4x59.1 smd paste+0 mask+2: 15(-275,-350.2) 16(-225,-350.2) 17(-175,-350.2) 18(-125,-350.2) 19(-75,-350.2) 20(-25,-350.2) 21(25,-350.2) 22(75,-350.2) 23(125,-350.2) 24(175,-350.2) 25(225,-350.2) 26(275,-349)
  rect 35.4x35.4 smd: 41(-114.2,-8.8) 41(-114.2,46.3) 41(-114.2,101.4) 41(-59.1,-8.8) 41(-59.1,46.3) 41(-59.1,101.4) 41(-3.9,-8.8) 41(-3.9,46.3) 41(-3.9,101.4)
  silkscreen extent -354,-360 355,646

## Free pads (board coordinates)
  round 118.1 hole 39.4: 1(3194,3299.2) 1(4718.4,4381.2)
  oval 60x80 hole 32 slot 45 at 90 deg: 1(3270.7,4431.3) 1(3361.3,4431.3) 1(4524,4431.3) 1(4607.8,4431.3)
  round 60 hole 36: 1(4356.4,4439.4) 1(4440.2,4439.4) 1(4500.6,3672.7) 1(4503.6,3987.7) 1(4600.6,3672.7) 1(4603.6,3987.7) 1(4700.6,3672.7) 1(4703.6,3987.7)
  round 60 smd: 1(4387.4,4204.4) 1(4463.8,4204.4) 1(4540.3,4204.4) 1(4616.7,4204.4)
  oval 80x60 smd: 6(3154.7,3522.5) 6(3154.7,3603.7) 6(3154.7,3684.8) 6(3154.7,3766) 6(3154.7,3847.1) 6(3154.7,3928.3) 6(3154.7,4009.4) 6(3155.7,3441.4)

## Via types
v1: diameter 24, hole 12, Top Layer to Bottom Layer, 135 vias
v2: diameter 30, hole 20, Top Layer to Bottom Layer, 8 vias
v3: diameter 50, hole 30, Top Layer to Bottom Layer, 2 vias

## Nets (pads, with @x,y where several pads share a name; then routed paths per layer and width w, separated by ;. In a path a pad name is that pad's centre, name@x,y a point inside that pad or via, vN(x,y) a via of type N, cw(c..) or ccw(c..) an arc to the next point about the centre after c; other vN are vias at no path point)
3V3: C1.2 C4.2 C6.1 C7.1 C10.2 C19.1 C21.2 C22.2 C23.1 LED2.4 LED3.4 LED4.4 pad.1@4540.3,4204.4 pad.1@4600.6,3672.7 pad.6@3154.7,3522.5 R1.1 R2.1 R3.1 R4.1 R5.1 R8.2 TF1.4 U1.2 U2.5 U3.5 | length 5800
  Top Layer w10: pad.6@3154.7,3522.5 3162.8,3514.4 3345.7,3514.4 3357.7,3502.4 3357.7,3421.4 3364.6,3414.4 R8.2 ; R1.1@4253.8,3300.4 R1.1@4254.2,3300.9 ; pad.1@4540.3,4204.4 4540.3,4077.8 4554.7,4063.4 4734.7,4063.4 4748.7,4049.4 4748.7,3764.4 4728.7,3744.4 4672.3,3744.4 pad.1@4600.6,3672.7
  Top Layer w19.7: R1.1@4255.2,3301.4 R2.1 R3.1 R4.1 R5.1
  Top Layer w20: v2@4404.3,3511.9 4406,3513.6 4527.5,3513.6 4566.7,3474.4 4566.7,3315.7 4552.4,3301.4 ; R5.1 4552.4,3301.4 ; v1(4574.7,3751.4) 4574.7,3773.4 4583,3781.8 U3.5 ; pad.1@4600.6,3672.7 4600.1,3672.2 C10.2 4595.1,3595.4 4594.7,3595 4594.7,3318.4 4577.6,3301.4 4552.4,3301.4
  Top Layer w35: v2(4070.8,3315.7) v1(4092.3,3315.7) 4196.6,3315.7 4210.6,3301.7 R1.1@4248.2,3301.7
  Bottom Layer w10: 3331.7,3862.9 3331.7,3755.4 3338.3,3748.8 LED4.4 3431.8,3748.8 C21.2 ; C4.2@3391.2,4052.6 C1.2@3391.2,4120.5 ; LED2.4 4020.8,3748.8 4029.7,3739.9 4029.7,3712.5 4036.7,3705.4 4099.7,3705.4 4114.7,3690.4 4114.7,3675.7 4122.7,3667.7 4391.4,3667.7 4401.6,3657.4 TF1.4 ; TF1.4@4402.2,3581 4402.2,3514.9 v2(4402.9,3514.2) ; v1@4574.7,3745.4 v1(4574.7,3751.4)
  Bottom Layer w19.7: v2(3126.9,3520.7) 3110.2,3504 3110.2,3252.6 3158.5,3204.3 3658,3204.3 3717.6,3144.7 3975.4,3143.6 3990.6,3158.8 3990.6,3244.5 4008.6,3262.4 4066.7,3262.4 4080.7,3276.4 v2@4080.7,3306.4 ; v2(4070.8,3315.7) v2@4077.7,3308.8
  Bottom Layer w20: LED3.4 4546.1,3745.4 v1@4574.7,3745.4 ; pad.1@4600.6,3672.7 4574.7,3698.7 v1@4574.7,3745.4 ; C22.2@4606.1,3745.4 v1@4574.7,3745.4
  Bottom Layer w30: v2(3126.9,3520.7) 3126.9,3836.4 3153.4,3862.9 3331.7,3862.9 3353.1,3862.9 3380.3,3890.1 3380.3,4041.7 C4.2 ; 3129.9,3570.7 3154.9,3545.8 v2(3154.9,3520.7)
  Bottom Layer w35: v2(3431.4,4057.3) v2(3431.4,4087.7)
$1N4996: L1.2 MAX1.9 | length 113.9
  Top Layer w10: MAX1.9@3379,4324.1 3379,4365.6 3395.3,4382 L1.2@3444.6,4382
$1N5076: L2.2 MAX1.10 | length 213
  Top Layer w10: L2.2@3194.5,4378.4 3195.5,4379.4 3344.1,4379.4 3359.2,4364.4 MAX1.10@3359.2,4322.7
$1N51991: LED1.2 R7.2 | length 159.1
  Top Layer w10: LED1.2 3552.8,3351.5 3572.7,3371.4 R7.2
$1N65341: R10.2 U4.6 | length 71.4
  Bottom Layer w10: U4.6 4526.7,4138.4 4542.7,4154.4 R10.2
$1N65342: R9.2 U4.7 | length 70.8
  Bottom Layer w10: U4.7 4565.5,4088.4 R9.2@4570.8,4093.7
$1N65343: LED_RED1.1 R9.1 R19.2 | length 2570.7
  Bottom Layer w10: LED_RED1.1@3838.7,3245.9 3893.2,3245.9 3911.7,3264.4 3911.7,3611.4 3931.7,3631.4 4203.1,3631.4 4216.7,3617.8 4216.7,3531.5 4177.6,3492.5 4177.6,3316.3 4186.5,3307.4 4751.7,3307.4 4760.7,3316.4 4760.7,4023.4 4750.7,4033.4 4658.7,4033.4 ; R9.1 4613.7,4080.8 R19.2 4647.7,4045.4 4658.7,4034.4
$1N65345: R11.1 U4.2 | length 88.9
  Bottom Layer w10: R11.1@4202.8,4067.1 4202.8,4083.7 4207.6,4088.4 U4.2
$1N65356: LED_GREEN1.1 R10.1 | length 2763
  Bottom Layer w10: LED_GREEN1.1@3764.7,3245.9 3767.7,3242.9 3767.7,3216.4 3772.7,3211.4 3909.7,3211.4 3928,3229.7 3928,3236.5 3928.7,3237.2 3928.7,3600.4 3941.7,3613.4 4187.6,3613.4 4200.7,3600.4 4200.7,3542.1 4159.9,3501.3 4159.9,3306.5 4175,3291.4 4760.1,3291.4 4778.1,3309.4 4778.1,4031.9 4760.5,4049.4 4675.5,4049.4 4657.8,4067.1 4657.8,4111.2 4646.7,4122.4 4632.7,4122.4 4626.3,4128.7 R10.1
$1N69447: D1.2 R12.2 R13.1 | length 146
  Bottom Layer w10: D1.2 3702.7,4126.2 R12.2 3739.7,4205.4 R13.1
$1N69451: Q3.1 R14.2 R16.1 | length 122.7
  Bottom Layer w10: Q3.1@4066,3904.8 R16.1@4133.1,3904.8 ; R16.1 R16.1@4133.1,3904.8 ; R14.2 R16.1@4133.1,3904.8
$1N69456: Q2.1 R15.1 R30.2 | length 229.7
  Bottom Layer w10: Q2.1 3674.3,3852.8 3681.7,3845.4 3807.3,3845.4 R15.1 3861.3,3845.7 R30.2
$1N69894: Q3.3 R30.1 | length 64
  Bottom Layer w10: R30.1 3965.3,3850.4 Q3.3
$1N70173: LED2.3 LED3.1 | length 554.3
  Top Layer w10: v1(4346.7,3745.4) 4435.7,3745.4 v1(4436.7,3746.4)
  Bottom Layer w10: LED2.3 4331,3792.1 4346.7,3776.4 v1(4346.7,3745.4) ; v1(4436.7,3746.4) 4468.4,3746.4 LED3.1
$1N70177: LED2.1 LED4.3 | length 533.3
  Bottom Layer w10: LED4.3 3498,3792.1 3541.3,3748.8 LED2.1
$1N75267: R22.2 USB1.A5 | length 285.2
  Bottom Layer w6: USB1.A5 3542.9,3357.6 3555.9,3370.6 3743.3,3370.6 R22.2
$1N75272: R23.2 USB1.B5 | length 515.1
  Bottom Layer w6: USB1.B5 3424.8,3412.5 3437.6,3425.3 3553.7,3425.3 3588.7,3390.4 3730.7,3390.4 3734.9,3394.6 3734.9,3441.4 3743.1,3449.6 R23.2 ; R23.2@3769.8,3444.6 R23.2@3771.1,3444.6
$1N75451: pad.1@4356.4,4439.4 R24.1 U1.39 | length 367.2
  Top Layer w10: U1.39 4313.5,4149.2 4325.7,4161.4 4325.7,4266.4 4338.7,4279.4 R24.1 4357,4438.8 pad.1@4356.4,4439.4
$1N90973: R31.1 U2.3 | length 93.8
  Bottom Layer w10: R31.1 3571.4,3975.8 U2.3
$1N93858: pad.1@4603.6,3987.7 R32.2 U3.1 | length 440.9
  Top Layer w10: R32.2@4500.6,3916.7 4543.2,3916.7 4543.3,3916.6 4561.6,3916.6 4561.8,3916.7 4590.7,3916.7 ; pad.1@4603.6,3987.7 4603.6,3929.6 4590.7,3916.7 ; U3.1 4699.2,3781.8 4707.2,3789.7 4707.2,3903.9 4694.4,3916.7 4590.7,3916.7
$1N93902: pad.1@4500.6,3672.7 R33.1 U3.6 | length 546
  Top Layer w10: v1(4408.3,3718) 4614.8,3718 4636.6,3739.9 U3.6@4636.6,3781.7 ; v1(4408.3,3816.4) 4487.7,3816.4 4500.6,3829.4 R33.1 ; 4494.6,3716.9 4500.6,3710.9 pad.1@4500.6,3672.7
  Bottom Layer w10: v1(4408.3,3718) 4408.3,3814.7 v1@4410,3816.4
$1N93941: pad.1@4503.6,3987.7 R34.1 U3.4 | length 338.6
  Top Layer w10: R34.1@4488,3780.9 4512.3,3780.9 4536.7,3805.3 ; v1(4502.6,3889.7) 4527.3,3889.7 4536.7,3880.4 4536.7,3805.3 ; U3.4 4601,3814.4 4545.8,3814.4 4536.7,3805.3
  Bottom Layer w10: v1(4502.6,3889.7) 4502.6,3986.6 pad.1@4503.6,3987.7
$1N109254: Q1.1 R12.1 | length 196.3
  Bottom Layer w10: R12.1 3748,4154.4 3884.7,4154.4 3895.1,4144 Q1.1
BAT+: C12.1 C13.1 pad.1@4524,4431.3 Q1.3 R17.2 U4.5 | length 1037.8
  Bottom Layer w10: R17.2@4427.7,4377.4 4484.7,4377.4 C12.1@4524,4338.2
  Bottom Layer w25: C12.1@4524,4338.2 pad.1@4524,4431.3
  Bottom Layer w30: Q1.3 3881.4,4223.4 4482.7,4223.4 4500.7,4205.4 ; U4.5@4507.7,4182.9 4525.6,4200.9 4525.6,4316 4535.9,4326.3 C12.1@4524,4338.2
BAT_DET: C18.2 R17.1 R18.2 R24.2 | length 158.3
  Top Layer w10: R24.2 4426.7,4289.7 v1(4426.7,4302.4)
  Bottom Layer w10: R17.1 4385.7,4377.4 4427.7,4335.4 v1@4427.7,4302.4
  Bottom Layer w25: v1(4426.7,4302.4) 4436,4293 C18.2
CHRG: pad.1@4440.2,4439.4 R19.1 R28.2 R29.1 U1.38 | length 1200.5
  Top Layer w10: U1.38 4273.8,4107.5 v1(4317.7,4107.5) 4339.8,4107.5 4346.2,4113.9 4346.2,4237.4 4356.2,4247.4 4444.7,4247.4 4458.7,4261.4 4458.7,4412.8 pad.1@4440.2,4431.3 ; v1(4362.3,3987.5) 4422.7,3987.5 4432.7,3997.5 4432.7,4022.4 4442.7,4032.4 4543.7,4032.4 4553.7,4022.4 4553.7,3957.4 v1(4564.6,3946.4)
  Bottom Layer w6: v1(4564.6,3946.4) 4564.6,4043.2 4566.8,4045.4 R19.1
  Bottom Layer w10: v1(4317.7,4107.5) 4317.7,3991.8 4322,3987.5 v1(4362.3,3987.5) ; v1(4564.6,3946.4) 4564.6,3944.7 R29.1 R28.2
EN: C9.2 R8.1 SW5.2 U1.3 | length 1125.2
  Top Layer w10: SW5.2 3381,3557 3394.7,3543.4 3394.7,3474.1 R8.1 3396.5,3471.6 C9.2 3480.9,3488.9 v1(3480.9,3617.4) ; U1.3@3570.7,4101.1 3637.9,4101.1 3653.4,4085.7 v1(3653.4,3657)
  Bottom Layer w10: v1(3480.9,3617.4) 3480.9,3644.6 3493.2,3657 3631.7,3657 3631.8,3657 v1(3653.4,3657)
GND: C1.1 C2.1 C3.1 C4.1 C5.1 C6.2 C7.2 C8.1 C9.1 C10.1 C11.2 C12.2 C13.2 C14.2 C15.1 C16.1 C17.2 C18.1 C19.2 C20.1 C21.1 C22.1 C23.2 C24.1 C25.1 C26.1 LED1.1 LED2.2 LED3.2 LED4.2 MAX1.3 MAX1.11 MAX1.15 MAX1.17 pad.1@4607.8,4431.3 pad.1@4616.7,4204.4 pad.1@4700.6,3672.7 pad.1@4703.6,3987.7 pad.6@3154.7,3928.3 pad.6@3155.7,3441.4 Q3.2 R11.2 R13.2 R16.2 R18.1 R22.1 R23.1 R28.1 SCREW1.1 SCREW2.1 SW1.2 SW1.3 SW1.4 SW2.2 SW2.3 SW2.4 SW3.1 SW3.3 SW3.4 SW4.1 SW4.3 SW4.4 SW5.1 SW6.2 TF1.6 TF1.10 TF1.11 TF1.12 TF1.13 U1.1 U1.40 U1.41 U2.2 U3.2 U3.3 U4.1 U4.3 U4.9 U5.2 USB1.13 USB1.14 USB1.15 USB1.16 USB1.A1B12 USB1.B1A12 | length 683.6
  Top Layer w10: MAX1.15@3298,4256.7 3321.1,4256.7 3322.1,4255.7 ; v1@3322.9,4257.2 3337.2,4257.2 MAX1.17@3339.8,4259.8 ; MAX1.17@3338.5,4268 3340,4269.6 MAX1.11@3340,4314.7 ; MAX1.17@3355.4,4267.5 3360.5,4262.4 MAX1.3@3360.5,4213.7
  Bottom Layer w10: USB1.14@3318.3,3318.4 3320.6,3320.7 USB1.B1A12@3367.4,3320.7 ; USB1.15@3673,3126.2 3683.2,3126.2 3704.9,3104.5 ; 3704.9,3101.5 4037.4,3101.5 4064.3,3128.3 4064.3,3187.3 TF1.12@4051.9,3199.7
  other v1: 3188.7,3136.4 3388.7,3136.4 3488.7,3136.4 4088.7,3136.4 4188.7,3136.4 4488.7,3136.4 4788.7,3136.4 3787.8,3173.4 4492.3,3176.1 4732.3,3176.1 4812.3,3176.1 3288.7,3236.4 4488.7,3236.4 4788.7,3236.4 4652.3,3256.1 4732.3,3256.1 4812.3,3256.1 3288.7,3336.4 4812.3,3336.1 3152.9,3376.4 3197.4,3376.4 3152.9,3402.5 3197.4,3403.4 3152.9,3429.5 3197.4,3430.4 3604.7,3446.4 3647.7,3446.4 4812.3,3496.1 4566.4,3531.7 4490,3542.6 4706.2,3561.3 4812.3,3576.1 4088.3,3581.1 4706.2,3589.9 3361.7,3591.4 3403.7,3591.4 3443.7,3591.4 4706.2,3616.5 3797,3643.5 3827.8,3643.5 3861,3643.5 3891.8,3643.5 4812.3,3656.1 3797,3671.5 3827.8,3671.5 3861,3671.5 3891.8,3671.5 4812.3,3736.1 4123.1,3745.4 3801.7,3774.7 3833.7,3774.7 3801.7,3804.4 3833.7,3804.4 4812.3,3816.1 3294.5,3821.4 3453.7,3826.5 3420.2,3827.5 4114.8,3829.7 4148.4,3829.7 4178.8,3829.7 4212.4,3829.7 4675.7,3841.9 3453.7,3855.9 3420.2,3856.9 3454.2,3885.3 3420.8,3886.3 4675.7,3887.4 3903.7,3894.4 3876.9,3895.6 3941.7,3902.6 4213.1,3917.9 3941.7,3929.4 3837.7,3944.4 3810.9,3945.6 3252,3965.2 4812.3,3976.1 3252,3996.2 4073.5,4001.4 4120.7,4001.4 4167,4001.4 3252,4027.2 4072.3,4031.5 4119.5,4031.5 4165.8,4031.5 4812.3,4056.1 3252,4058.2 4072.3,4075.2 4353.7,4079.4 4165.8,4112.6 3620.5,4199.7 3650.2,4199.7 4812.3,4216.1 4672.7,4247.4 3334.1,4257.5 3164.4,4281.2 3244.4,4281.2 4630.3,4313.4 4324.9,4334.1 4324.9,4369.6 4812.3,4376.1
I2S-BCLK: MAX1.16 TP3.1 U1.6 | length 530.4
  Top Layer w10: MAX1.16@3297.1,4238.9 3297.1,4182.8 3320,4159.9 3320,4002.4 3338.1,3984.4 3516.7,3984.4 3525.7,3975.5 3525.7,3965.4 3536.7,3954.4 3571.3,3954.4 U1.6
I2S-DIN: MAX1.1 TP2.1 U1.5 | length 416.4
  Top Layer w10: MAX1.1@3319.7,4208.3 3319.7,4189.6 3339.1,4170.2 3339.1,4017.8 3354.4,4002.4 U1.5@3550.6,4002.4
I2S-LRC: MAX1.14 TP4.1 U1.7 | length 601.9
  Top Layer w10: MAX1.14@3286.9,4276.5 3277.4,4276.5 3267.4,4266.5 3267.4,4186.2 3299.9,4153.7 3299.9,3992.6 3325.1,3967.4 3492.6,3967.4 U1.7@3554.7,3905.4
I2S-SD: MAX1.4 R6.2 TP1.1 U1.4 | length 521
  Top Layer w10: MAX1.4@3379.6,4214.7 3379.6,4193.8 3355.5,4169.7 3355.5,4028.7 3364.2,4020.1 3529.3,4020.1 U1.4@3553.9,4044.6 ; MAX1.4@3381.9,4217.3 3472.2,4217.3 R6.2@3488.2,4233.4
IO0: R21.1 SW6.1 U1.27 | length 679
  Top Layer w10: U1.27 4265.5,3479.6 4275.7,3469.4 4525.7,3469.4 4535.7,3459.4 v1(4535.7,3387.7) ; v1(4637.3,3387.7) 4637.3,3361.4 R21.1 4690.8,3360.7 SW6.1
  Bottom Layer w10: v1(4535.7,3387.7) v1(4637.3,3387.7)
KEY-ADD: SW4.2 U1.17 | length 570.7
  Top Layer w10: U1.17@3744.1,3498 3746,3496.1 3746,3362.1 3778.4,3329.7 v1(3953.4,3329.7) ; v1(3954.5,3217.7) 3956.4,3215.8 SW4.2@4054.4,3215.8
  Bottom Layer w10: v1(3953.4,3329.7) 3953.4,3218.7 v1(3954.5,3217.7)
KEY-MIN: SW1.1 U1.23 | length 1023.7
  Top Layer w10: SW1.1@3512,3225.8 3562,3225.8 3578.7,3242.4 3578.7,3314.4 3599.7,3335.4 3721,3335.4 3783,3273.4 3976.7,3273.4 v1(3979.8,3276.4) ; v1@3982.8,3579.9 4033.2,3579.9 4046,3567.1 U1.23
  Bottom Layer w10: v1@3979.8,3276.5 3979.8,3576.9 v1@3982.8,3579.9
  other v1: 3979.8,3579.9
KEY-MODE: R21.2 SW2.1 U1.22 | length 1588.8
  Top Layer w6: SW2.1 3873,3227.8 3894.7,3249.4 3988.7,3249.4 4009.9,3270.7 4632.9,3270.7 4636.7,3274.4 R21.2
  Top Layer w10: v1(3703.8,3290.3) 3738.8,3290.3 3773.7,3255.4 3840.3,3255.4 SW2.1 ; v1(3885.8,3553.2) 3988.5,3553.2 3995.5,3546.1 3995.5,3507.1 U1.22@3998,3504.6
  Bottom Layer w10: v1(3703.8,3290.3) 3703.8,3331.6 3719.7,3347.4 3873.7,3347.4 3885.8,3359.6 v1(3885.8,3553.2)
KEY-PWR: SW3.2 U5.3 | length 1151.3
  Top Layer w10: v1(4172,3553) 4171.3,3553.6 4171.3,3721.1 v1(4172.7,3722.4) ; v1(4367.1,3218.7) 4408,3218.7 SW3.2@4408.1,3218.6
  Bottom Layer w10: v1(4172,3553) 4142.2,3523.1 4142.2,3227.9 4151.7,3218.4 4208.4,3218.4 4208.9,3218.9 4366.9,3218.9 v1(4367.1,3218.7) ; v1(4172.7,3722.4) 4366.7,3722.4 4381.7,3737.4 4381.7,3844.4 4386.3,3849 U5.3
LED-BLINK: R7.1 U1.24 | length 646.7
  Top Layer w10: R7.1 3709.7,3371.4 3780,3301.1 4013.8,3301.1 v1(4014.8,3302.1) ; v1(4095.9,3455.1) U1.24@4095.9,3498.8
  Bottom Layer w10: v1@4013.2,3305.2 4013.2,3443.6 4024.7,3455.1 v1(4095.9,3455.1) ; v1(4014.8,3302.1) v1@4015.6,3302.9
MIC-SCK: R34.2 U1.32 | length 196
  Top Layer w10: U1.32 4346.3,3799.2 4364.6,3780.9 R34.2@4453.9,3780.9
MIC-SD: R33.2 U1.33 | length 177.2
  Top Layer w10: U1.33 4437.8,3849.2 R33.2
MIC-WS: R32.1 U1.34 | length 183
  Top Layer w10: U1.34 4339.3,3899.2 4356.8,3916.7 R32.1@4441.3,3916.7
PWR_ON: R14.1 U5.1 | length 284.8
  Bottom Layer w10: R14.1@4181.8,3961.6 4421.5,3961.6 4431,3952.1 U5.1 ; U5.1@4425.3,3923.8 U5.1@4427.7,3926.2
RXD0: pad.1@4463.8,4204.4 U1.36 | length 348.2
  Top Layer w10: U1.36 4314.3,3999.2 4338.5,4023.4 4393.7,4023.4 4463.8,4093.6 pad.1@4463.8,4204.4
SD-CLK: R3.2 TF1.5 U1.20 | length 900.5
  Top Layer w10: U1.20@3898.1,3483 3896.1,3481 3896.1,3427.3 3912.7,3410.7 4362.3,3410.7 4374.6,3398.4 R3.2@4374.6,3363.2 ; v1(4349.8,3358.6) 4375.2,3358.6 R3.2@4376.1,3357.8
  Bottom Layer w10: v1(4349.8,3358.6) 4349.8,3426.4 4411.1,3487.7 4437.3,3487.7 4447.3,3497.7 4447.3,3591.2 TF1.5
SD-CS: R1.2 TF1.2 U1.18 | length 876.4
  Top Layer w10: U1.18@3801.3,3493.1 3801.3,3482.1 3796.4,3477.2 3796.4,3380.7 3820.3,3356.8 4238.8,3356.8 v1(4240.1,3358) 4250.8,3358 R1.2@4251.1,3357.8
  Bottom Layer w10: v1(4240.1,3358) 4256.7,3374.6 4256.7,3453 4266.7,3463 4300.7,3463 ; TF1.2@4314.1,3579.6 4314.1,3476.4 ; 4300.7,3463 4306.8,3469.1 4311.7,3469.1 4311.7,3474 4314.1,3476.4 ; 4300.7,3463 4305.6,3463 4314.1,3471.5 4314.1,3476.4
SD-MISO: R4.2 TF1.7 U1.21 | length 930.8
  Top Layer w10: U1.21@3950.7,3491.4 3946.7,3487.4 3946.7,3440.9 3958.4,3429.3 4418.3,3429.3 4434.9,3412.7 R4.2@4434.9,3362.9 ; v1(4411,3358.6) 4435,3358.6 R4.2@4439.3,3362.9 ; R4.2@4434.9,3358.3 R4.2@4436.9,3356.2
  Bottom Layer w10: v1(4411,3358.6) 4439.4,3358.6 4454.2,3373.3 4454.2,3415.6 4472.1,3433.4 4515.9,3433.4 4528.9,3446.4 TF1.7@4528.9,3563.4
SD-MOSI: R2.2 TF1.3 U1.19 | length 887.3
  Top Layer w10: U1.19@3852,3488 3845.7,3481.7 3845.7,3403.1 3860.1,3388.8 4307.5,3388.8 4314.6,3381.7 4312.9,3380 R2.2@4312.9,3359.2 ; v1(4287.4,3358.6) 4315.1,3358.6 R2.2@4315.5,3358.3
  Bottom Layer w10: v1(4287.4,3358.6) 4287.4,3439.2 4293.7,3445.4 4339.2,3445.4 4358.7,3464.9 TF1.3@4358.7,3573
SD-SD: R5.2 TF1.9 U1.31 | length 1102
  Top Layer w10: U1.31@4265.4,3749.5 4215.3,3749.5 4210.1,3744.3 4210.1,3553.9 4225,3538.9 4225,3461.3 4235.6,3450.7 4480.8,3450.7 4499.3,3432.3 R5.2@4499.3,3358.1 ; v1@4473.5,3357.9 4502.7,3357.9 R5.2@4503.1,3358.3
  Bottom Layer w10: v1(4473.5,3358.6) 4504.4,3358.6 4510.8,3365 4510.8,3407.6 4520.7,3417.4 4607.5,3417.4 4619.6,3429.5 4619.6,3592 TF1.9
SPK+: C2.2 L1.1 pad.1@3361.3,4431.3 | length 168.3
  Top Layer w10: pad.1@3351.6,4433.5 pad.1@3372.4,4433.5 ; pad.1@3372.4,4436.9 3440.1,4436.9 C2.2@3440.4,4437.2 ; C2.2@3441,4437.8 C2.2@3440.4,4437.2 ; L1.1@3492.4,4380.2 3492.4,4385.3 C2.2@3440.4,4437.2
SPK-: C3.2 L2.1 pad.1@3270.7,4431.3 | length 156.8
  Top Layer w10: L2.1@3149.6,4382.9 C3.2@3202.2,4435.6 ; C3.2@3186.7,4436.6 3188.7,4438.7 pad.1@3254.8,4438.7 ; pad.1@3262.7,4428.1 pad.1@3267.5,4432.9 ; pad.1@3267,4441.6 pad.1@3271.6,4437
TFT-BLK: pad.6@3154.7,4009.4 U1.8 | length 557.3
  Top Layer w10: pad.6@3154.7,4009.4 3211.7,4009.4 3220.7,4000.4 3220.7,3952.4 3232.2,3940.9 3477.2,3940.9 3485.7,3932.4 3485.7,3862.4 3498.8,3849.2 U1.8
TFT-DC: pad.6@3154.7,3847.1 U1.9 | length 441.6
  Top Layer w10: pad.6@3154.7,3847.1 3310,3847.1 3356.7,3800.4 3575.3,3800.4 U1.9
TFT-RES: pad.6@3154.7,3766 U1.10 | length 428.8
  Top Layer w10: pad.6@3154.7,3766 3228.1,3766 3244.7,3749.4 3576.3,3749.4 U1.10
TFT-SCL: pad.6@3154.7,3603.7 U1.12 | length 440.8
  Top Layer w10: pad.6@3154.7,3603.7 3227,3603.7 3272.7,3649.4 3576.3,3649.4 U1.12
TFT-SDA: pad.6@3154.7,3684.8 U1.11 | length 427.9
  Top Layer w10: pad.6@3154.7,3684.8 3221.1,3684.8 3235.7,3699.4 3576.3,3699.4 U1.11
TXD0: pad.1@4387.4,4204.4 U1.37 | length 269.5
  Top Layer w10: U1.37 4374.5,4049.2 4386.7,4061.4 4386.7,4203.6 pad.1@4387.4,4204.4
UDB-D+: U1.14 USB1.A6 USB1.B6 | length 393.7
  Top Layer w10: v1(3502.8,3385.2) 3502.8,3540.7 3502.5,3540.9 3511.1,3549.5 3569.2,3549.5 U1.14@3571.4,3547.3
  Bottom Layer w10: USB1.B6@3464.4,3326.2 3464.6,3326.3 3464.6,3378.9 3470.9,3385.2 v1(3502.8,3385.2) 3503.5,3384.5 USB1.A6
USB-D-: U1.13 USB1.A7 USB1.B7 | length 509
  Top Layer w10: v1(3530,3404.3) 3528.8,3405.5 3528.8,3477.8 3544.1,3493.1 3600.9,3493.1 3617.3,3509.5 3617.3,3591.9 3610.1,3599.1 3600.1,3599.1 3599.4,3598.4 3578.6,3598.4 U1.13@3578.3,3598.8
  Bottom Layer w10: USB1.A7 3483.9,3279.2 3490.7,3272.4 3516.6,3272.4 3523.2,3279 USB1.B7 3523.2,3361.6 ; 3523,3361.6 3530,3368.6 v1(3530,3404.3)
VBATOUT: C5.2 C20.2 MAX1.7 MAX1.8 Q2.3 R6.1 R31.2 U2.1 | length 838.5
  Bottom Layer w25: v2(3459.7,4322.1) v2(3459.7,4290.4) 3459.7,4221.2 3479.7,4201.2 3561.5,4201.2 3585.1,4177.6 3585.1,4106.5 U2.1@3575.4,4096.8
  Bottom Layer w35: R31.2 3599,3934.7 C5.2 3607.8,3857.6 C20.2 3709.9,3793.4 Q2.3
  Bottom Layer w40: U2.1@3571.4,4096.8 3575.4,4096.8 3616.4,4096.8 3627.4,4085.8 3627.4,3926.6 3603.8,3903
VBUS: C8.2 C11.1 C14.1 C24.2 C25.2 C26.2 D1.1 D2.2 LED_GREEN1.2 LED_RED1.2 R29.2 U4.4 U4.8 USB1.A4B9 USB1.B4A9 | length 2730
  Top Layer w40: v3(3727.9,3664) 3727.9,4054.4 3767.2,4093.7 v3(4003.6,4093.7)
  Bottom Layer w6: U4.8 4538.7,4038.4 4547.7,4029.4 4547.7,3959.1 4540.6,3952.1 R29.2@4540.6,3906
  Bottom Layer w10: 3543.1,3252.4 3570.1,3225.4 3718.7,3225.4 3731.3,3238 3731.3,3308.4 3735.7,3312.9 LED_RED1.2@3838.7,3312.9 ; D1.1 3709.3,3972.7 v1(3709.3,3994.7) ; C14.1 4194.3,4159.4 C11.1@4202.4,4167.5 ; U4.4@4270.8,4175 4289.2,4193.4 4446.7,4193.4 4452.7,4187.4 4452.7,4048.1 4462.4,4038.4 U4.8
  Bottom Layer w18: USB1.B4A9@3398.2,3314.7 3398.2,3281.9 3427.7,3252.4 3543.1,3252.4 3558.7,3252.4 3590.6,3284.4 3590.6,3317.7 USB1.A4B9@3588.2,3320.1
  Bottom Layer w40: 3396.2,3462.4 3396.2,3490 3412.7,3506.4 3702.7,3506.4 3727.9,3531.7 v3(3727.9,3664) ; v3(4003.6,4093.7) 4003.6,4164.2 4004.3,4164.9 4114,4164.9 C14.1
VOUT: C15.2 C16.2 C17.1 D2.1 Q1.2 Q2.2 R15.2 U5.5 | length 972.2
  Bottom Layer w10: Q2.2@3764.7,3902.7 3810.3,3902.7 R15.2@3816.7,3909.1 ; D2.1 4024.7,3955.8 4024.7,3878.4 4034.7,3868.4 4247.1,3868.4 4265.7,3887 4334.2,3887 U5.5@4334.8,3886.4
  Bottom Layer w30: C16.2 3820.3,4040.6 Q1.2
  Bottom Layer w35: Q2.2 Q2.2@3764.7,3901.3 ; Q2.2@3764.7,3902.7 3764.7,4026.4 3774.2,4036 C16.2 3878.5,4036 C15.2 3958.7,4021.8 D2.1
WS2812: LED3.3 U1.25 | length 664.9
  Top Layer w10: U1.25 4146,3690 v1(4148.3,3692.3)
  Bottom Layer w10: v1(4148.3,3692.3) 4150,3694 4442.2,3694 4463.7,3715.4 4496.7,3715.4 4508.7,3727.4 4508.7,3786.4 4514.3,3792.1 LED3.3
pads on no net: LED4.1 MAX1.2 MAX1.5 MAX1.6 MAX1.12 MAX1.13 TF1.1 TF1.8 U1.15 U1.16 U1.26 U1.28 U1.29 U1.30 U1.35 U2.4 U5.4 U5.6 USB1.A8 USB1.B8

## Polygon pours and split planes (outlines as drawn)
GND on Bottom Layer (solid, remove dead copper, pour order 2): 3000,4537.1 3000,3000 4877.1,3000 4877.1,4537.1
GND on Top Layer (solid, remove dead copper, pour order 0): 3020,4537.1 3020,3028.6 4897.1,3028.6 4897.1,4537.1

## Keep-outs
Board Outline Layer:
  the board outline again, w10

## Other copper
Top Layer:
  drawing of 155 lines, arcs and shapes, not listed
Bottom Layer:
  drawing of 173 lines, arcs and shapes, not listed

## Silkscreen, mask and mechanical layers (free items; w line width, h text height)
Top Silkscreen Layer:
  drawing of 130 lines, arcs and shapes, not listed
  text "下单制板厚度选择0.8mm" at 3177.7,4555.4 h150
  text "SCL" at 4306,4357.1 h45
  text "SDA" at 4408.7,4357.1 h45
  text "P+" at 3242.6,4345.1 h45
  text "P-" at 3338.8,4345.1 h45
  text "3.3" at 4494.4,4233.9 h45
  text "GND" at 4577.6,4233.9 h45
  text "TX" at 4365.6,4113.9 h45
  text "RX" at 4434.5,4113.9 h45
  text "SCK" at 4460.7,4020.8 h45
  text "WS" at 4573.4,4020.8 h45
  text "G" at 4687.9,4020.8 h45
  text "BLK" at 3198.7,3986.4 h45
  text "ICS-43434" at 4531.7,3911.4 h45
  text "CS" at 3197.7,3905.1 h45
  text "DC" at 3197.7,3823.8 h45
  text "JLCJLCJLCJLC" at 3781.7,3766.4 h45
  text "INMP441" at 4809.7,3743.4 h45 r90
  text "RES" at 3197.7,3742.5 h45
  text "SDA" at 3197.7,3661.3 h45
  text "SCL" at 3197.7,3580 h45
  text "EN" at 3360.7,3552.4 h45
  text "SD" at 4477,3502.2 h45
  text "3.3V" at 4563.6,3502.2 h45
  text "G" at 4688.6,3502.2 h45
  text "3V" at 3197.7,3498.7 h45
  text "G" at 3197.7,3417.4 h45
  text "MIN" at 3387.2,3266.3 h55
  text "MODE" at 3727.8,3266.3 h55
  text "ADD" at 4097.9,3266.3 h55
  text "IO0" at 4713.7,3231.4 h45
  text "PWR" at 4669.7,3156.4 h55
Bottom Silkscreen Layer:
  drawing of 4 lines, arcs and shapes, not listed
  text "SPK+" at 3302.1,4350.5 h45
  text "SPK-" at 3442.4,4350.5 h45
  text "BAT+" at 4586.7,4348.4 h45
  text "G" at 4641.7,4348.4 h45
  text "ArmourK08小智音响（1.54寸屏幕irony）" at 4791.2,3411.3 h50
  text "20250519" at 4791.2,3353.4 h50